# Altium PCB SolderingStation.PcbDoc
Units mil, origin at the board's own origin, x right, y up, seen from the top; angles counter-clockwise.
Board outline 5325 x 3910 mil, 2 copper layers (Top Layer, Bottom Layer); 64 components, 58 nets, 210 pads, 5 vias.
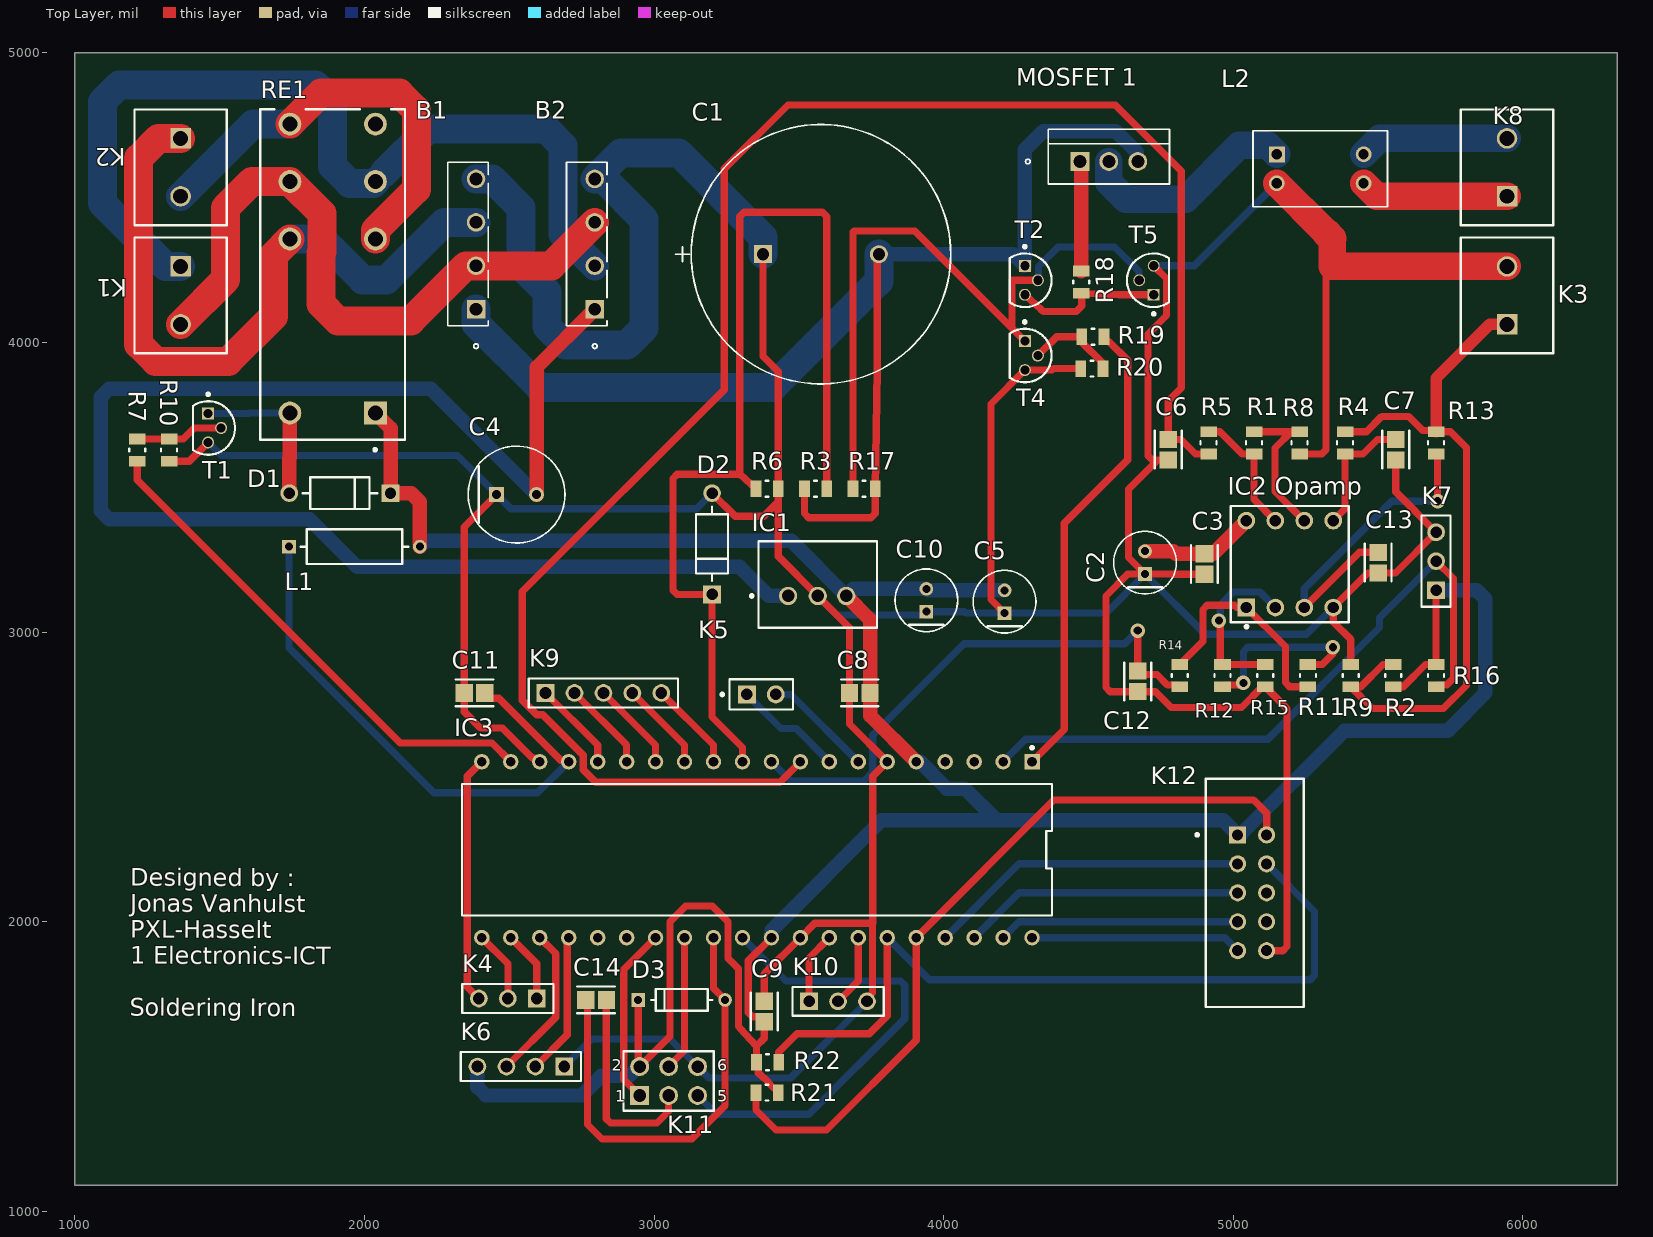
[diagram p0: Top Layer view]
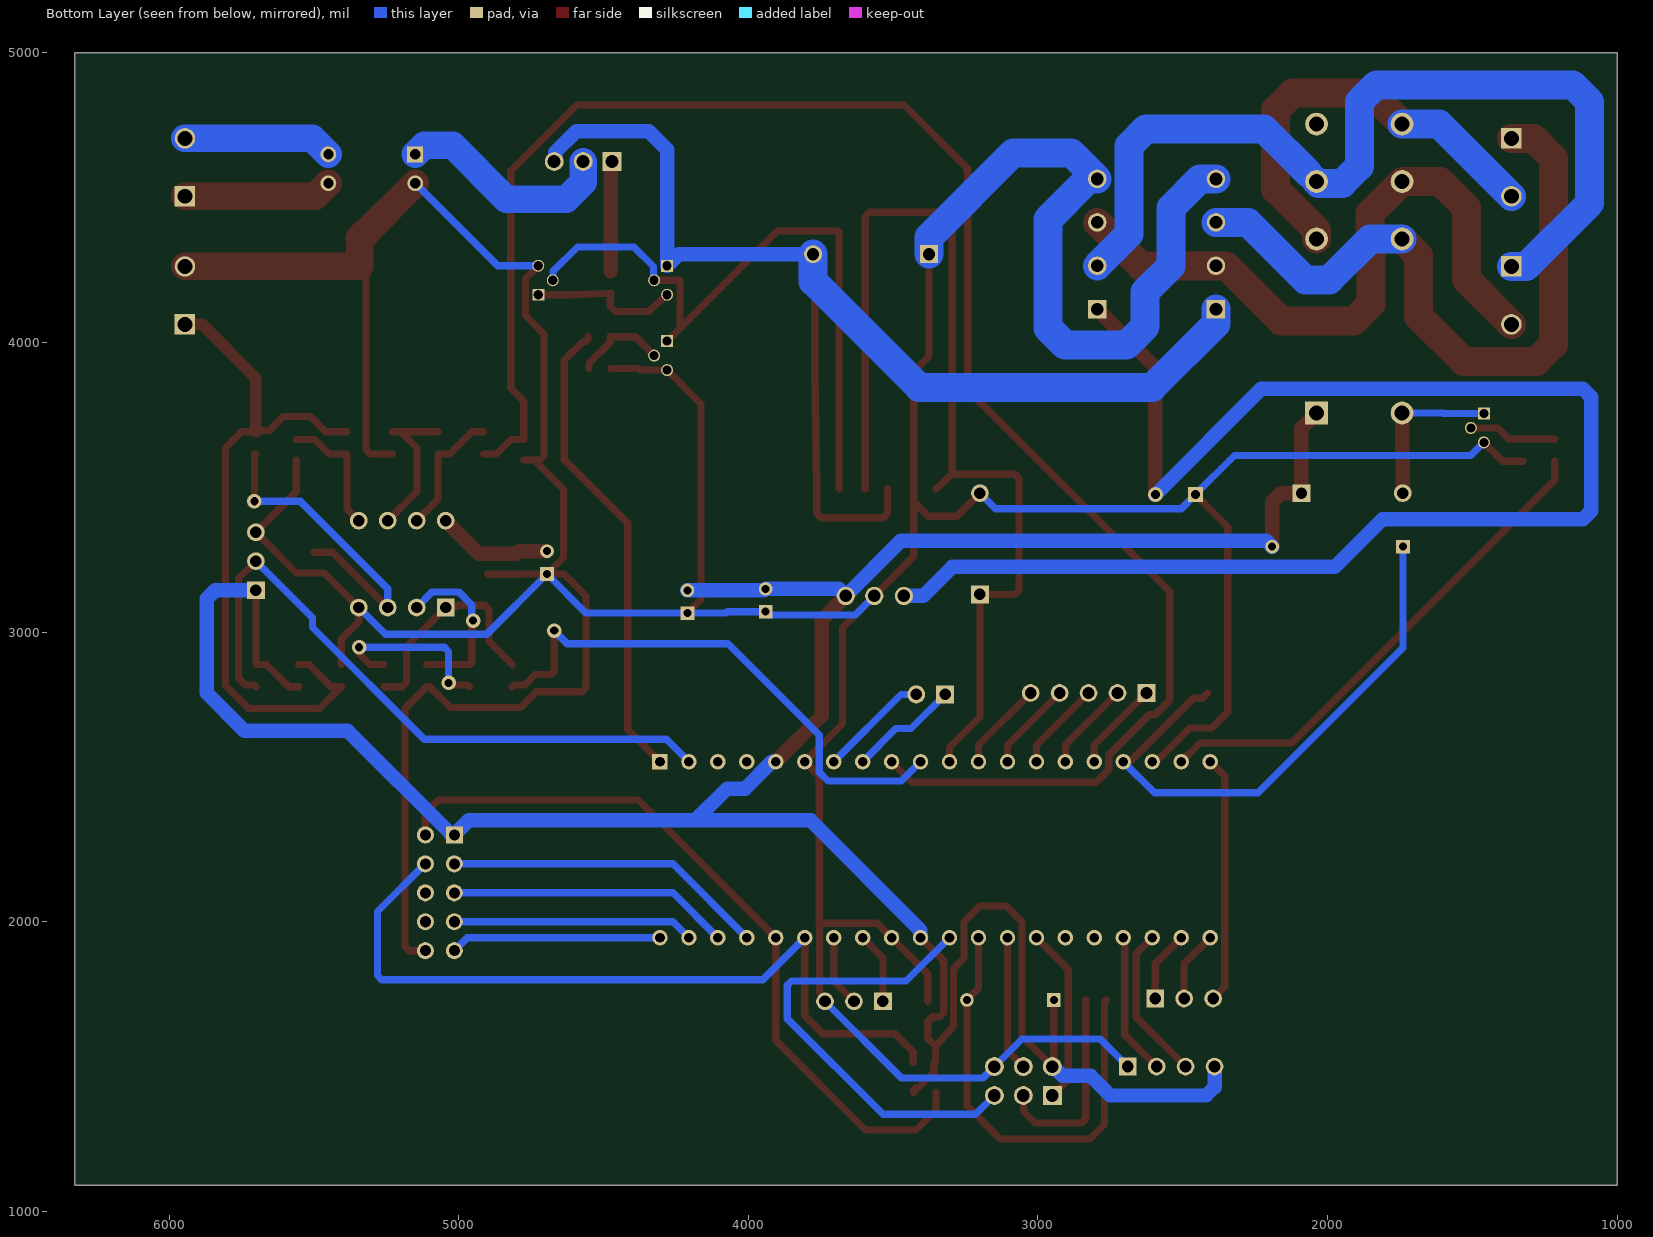
[diagram p1: Bottom Layer view, seen from below]
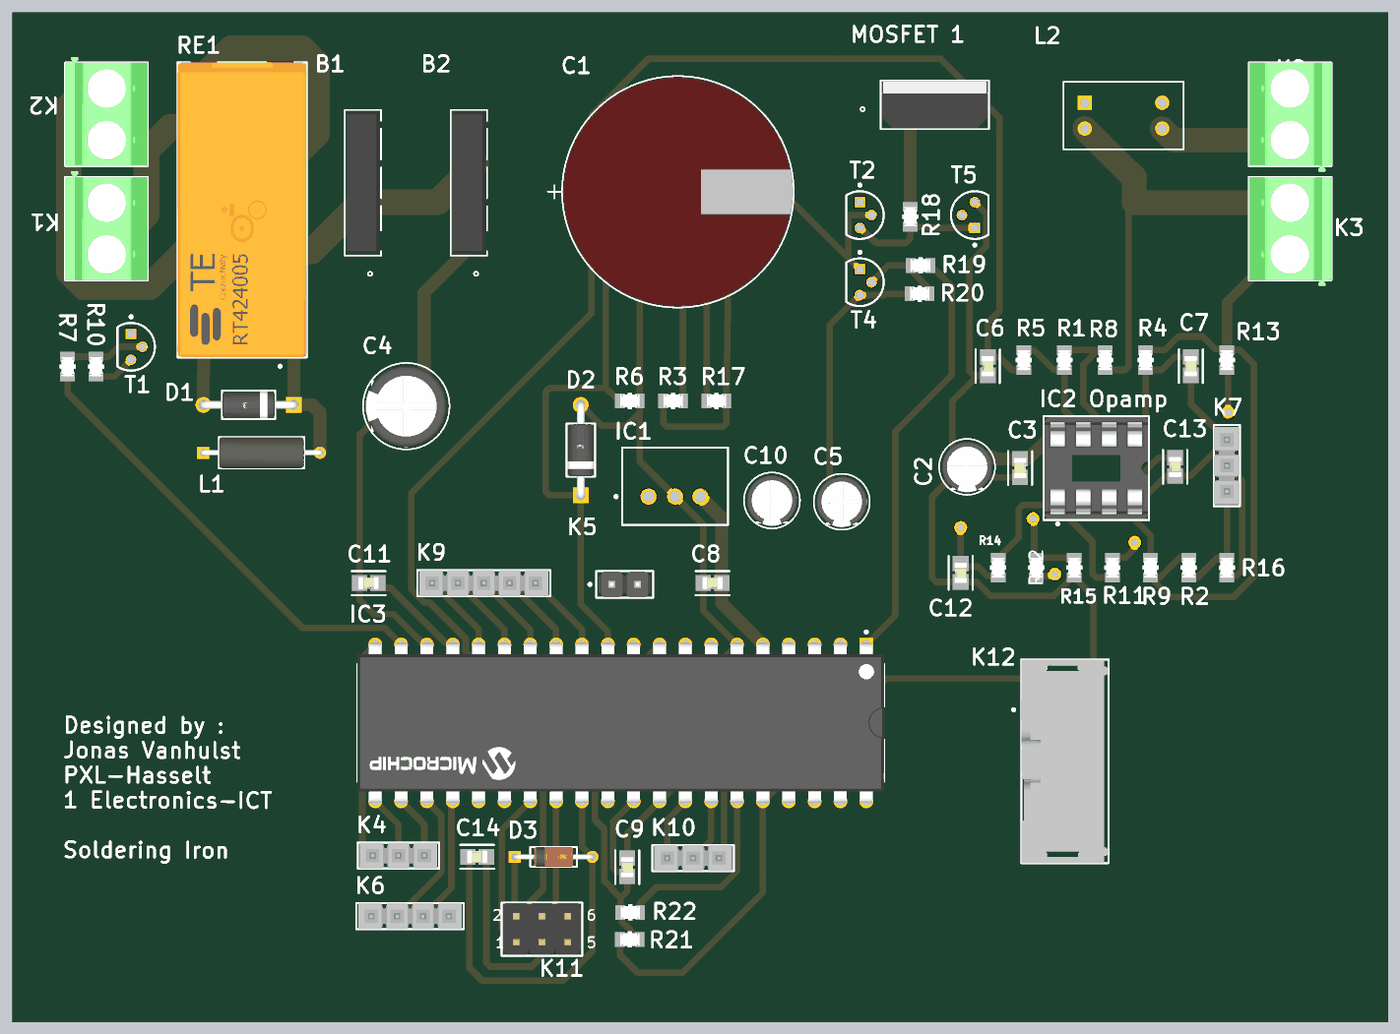
[diagram p2: 3D render of the assembled board from above, using the file's embedded part models]

## Layer stack, top to bottom
Top Solder: solder mask 0.4, Solder Resist, Dk 3.5
Top Layer: signal copper 1.4
Dielectric 1: dielectric 12.6, FR-4, Dk 4.8
Bottom Layer: signal copper 1.4
Bottom Solder: solder mask 0.4, Solder Resist, Dk 3.5

## Board outline
1000,1090 6325,1090 6325,5000 1000,5000

## Design rules (kind name [scope] priority, off if disabled: settings)
Clearance [All] p1: gap=10 ignorepadtopadclearanceinfootprint=FALSE except(0: Arc-Hole Track-Hole SMDPad-Hole THPad-Hole Via-Hole Fill-Hole Poly-Hole Region-Hole Text-Hole)
Height [All] p1: minheight=0 maxheight=2000 prefheight=500
HoleSize [All] p1: absolutevalues=TRUE maxlimit=1500 minlimit=1 maxpercent=80.000 minpercent=20.000
PolygonConnect [All] p1: connectstyle=Relief reliefconductorwidth=10 reliefentries=4 polygonreliefangle="90 Angle" airgapwidth=10
RoutingVias [All] p1: holewidth=28 width=50 viastyle="Through Hole" minholewidth=28 minwidth=50 maxholewidth=28 maxwidth=50
SolderMaskExpansion [All] p1: expansion=4 istentingtop=FALSE
Width [All] p1: maxlimit=100 minlimit=25 preferedwidth=25 minimp=50.000000 maximp=50.000000 favimp=50.000000
28 further rules are at their usual default settings.

## Classes and differential pairs
component class Voeding: B1 B2 C1 C4 C5 D1 D2 IC1 K1 K2 R3 R6 RE1
component class Thermokoppel: K8 L2 "MOSFET 1" R17 R18 R20 T2 T4 T5
component class PWM_Soldeerbout: C2 C3 C6 C7 C12 C13 "IC2 Opamp" K3 R1 R2 R4 R5 R8 R9 R11 R12 R13 R14 R15
component class Microprocessor: C8 C9 C10 C11 C14 D3 IC3 K4 K5 K6 K7 K9 K10 K11 K12 L1 R7 R10 R16 R19 R21 R22 T1

## Components (designator, comment, footprint, x,y, rotation, side; value= is the part's Value field where it differs from the comment)
B1 "D6KB6U" SIP4_D6K_MTC 2385,4115 r90 top
B2 "D6KB6U" SIP4_D6K_MTC 2795,4115 r90 top
C1 "4700µF 50V" CAP_Condensator_22X41 3376,4305 r0 top
C2 "10µF 50V" "cap 10µF 50V" 4695,3240 r90 top
C3 "100nF" FP-C0805C-DN-IPC_A 4900,3235.46 r270 top
C4 "100µF" "Cap 50V 100µF 8X11" 2525,3475 r0 top
C5 "10µF" "cap 10µF 50V" 4210,3105 r90 top
C6 "10nF" FP-C0805C-DN-IPC_A 4775,3630 r90 top
C7 "10nF" FP-C0805C-DN-IPC_A 5560.7,3630 r90 top
C8 "100nF" FP-C0805C-DN-IPC_A 3710,2790 r180 top
C9 "100nF" FP-C0805C-DN-IPC_A 3380,1690 r90 top
C10 "10µF 50V" "cap 10µF 50V" 3940,3110 r90 top
C11 "100nF" FP-C0805C-DN-IPC_A 2379.54,2790 r180 top
C12 "10nF" FP-C0805C-DN-IPC_A 4670,2830 r90 top
C13 "10nF" FP-C0805C-DN-IPC_A 5500,3240 r90 top
C14 "100nF" FP-C0805C-DN-IPC_A 2799.54,1730 r0 top
D1 "1N4007" 1N4007 1915,3480 r180 top value=15pF
D2 "5V1" 1N4007 3200,3305 r90 top
D3 "1N4148" 1N4148 3095,1730 r0 top
IC1 "OKI-78SR-5/1.5-W36-C" IC1 3565,3125 r0 top
"IC2 Opamp" "MCP6002-E/P" "8pin Socket" 5195,3235 r0 top
IC3 "ATMEGA4809-PF" ATMEGCPU 3355,2248.75 r270 top
K1 "1729128" "2pin connector" 1365,4162.71 r270 top
K2 "1729128" "2pin connector" 1365,4605 r270 top
K3 "" "2pin connector" 5945,4162.71 r90 top
K4 "" "Pinheader (1rij-3pin)" 2595,1735 r180 top
K5 "" "Pinheader (1rij-2pin)" 3370,2785 r0 top
K6 "" "Pinheader (1rij-4pin)" 2690,1500 r180 top
K7 "" "Pinheader (1rij-3pin)" 5700,3145 r90 top
K8 "" "2pin connector" 5945,4605 r90 top
K9 "" "Pinheader (1rij-5pin)" 2625,2790 r0 top
K10 "" "Pinheader (1rij-3pin)" 3535,1725 r0 top
K11 "" "Pinheader (2rij-6pin)" 3050,1450 r0 top
K12 "N2510-6002RB" boxheader 5065,2100 r270 top
L1 "10µH" "Spoel L1 10µH,130mA" 1965,3295 r0 top value=10uH
L2 "" spoel2 5150,4650 r0 top
"MOSFET 1" "IRF9Z34NPBF" IRF 4470,4625 r0 top
R1 "18K" "Weerstand 1M ohm" 5071.44,3653.74 r90 top
R2 "1M" "Weerstand 1M ohm" 5552.5,2850 r90 top
R3 "68K" "Weerstand 1M ohm" 3557.5,3495 r0 top
R4 "5K6" "Weerstand 1M ohm" 5385.72,3653.74 r90 top value="5600.00 Ohm"
R5 "5K6" "Weerstand 1M ohm" 4914.3,3653.74 r90 top value="5600.00 Ohm"
R6 "10K" "Weerstand 1M ohm" 3390,3495 r0 top
R7 "10K" "Weerstand 1M ohm" 1215,3628.39 r270 top
R8 "100R" "Weerstand 1M ohm" 5228.58,3653.74 r90 top
R9 "10M" "Weerstand 1M ohm" 5405,2850 r90 top
R10 "4K7" "Weerstand 1M ohm" 1325,3628.39 r90 top
R11 "18K" "Weerstand 1M ohm" 5257.5,2850 r90 top
R12 "18K" "Weerstand 1M ohm" 4962.5,2850 r90 top
R13 "5K6" "Weerstand 1M ohm" 5700,3653.74 r90 top value="5600.00 Ohm"
R14 "5K6" "Weerstand 1M ohm" 4815,2850 r90 top value="5600.00 Ohm"
R15 "100R" "Weerstand 1M ohm" 5110,2850 r90 top
R16 "4K7" "Weerstand 1M ohm" 5700,2850 r90 top
R17 "4K7" "Weerstand 1M ohm" 3725,3495 r0 top
R18 "100R" "Weerstand 1M ohm" 4475,4208.39 r90 top
R19 "10K" "Weerstand 1M ohm" 4515,4020 r0 top
R20 "4K7" "Weerstand 1M ohm" 4511.61,3910 r0 top
R21 "4K7" "Weerstand 1M ohm" 3390,1410 r0 top
R22 "4K7" "Weerstand 1M ohm" 3391.61,1515 r180 top
RE1 "RT424005" Vermogenrelais 1890,4235 r90 top
T1 "BC547B" sot23 1460,3705 r270 top
T2 "BC547B" sot23 4280,4215 r270 top
T4 "BC547B" sot23 4280,3955 r270 top
T5 "BC557C" BC557C 4725,4215 r90 top

## Footprints (in the part's own frame and the unit in brackets; to place one, negate y for a bottom-side part, rotate by r counter-clockwise, add the part's x,y. Pads: shape width x height; smd on the part's side, far side on the other; paste and mask are expansions set on the pad)
1N4007 [mm]
  rect 1.55x1.55 hole 1 paste-1000 mask+0: 1(-4.44,0)
  round 1.55 hole 1 paste-1000 mask+0: 2(4.44,0)
  silkscreen extent -3.27,-1.4 3.27,1.4, body extent -5.32,-1.5 5.32,1.5, height 0.25
1N4148 [mm]
  rect 1.2x1.2 hole 0.7 paste-1000 mask+0: 1(-3.813,0)
  round 1.2 hole 0.7 paste-1000 mask+0: 2(3.813,0)
  silkscreen extent -2.68,-0.95 2.68,0.95, body extent -4.51,-1.05 4.51,1.05, height 0.25
"2pin connector" [mm] "Receptacle, 2-Leads, Body 8.1x10.16mm, Pitch 5.08mm"
  rect 1.8x1.8 hole 1.3: 1(-2.54,0)
  round 1.8 hole 1.3: 2(2.54,0)
  silkscreen extent -5.08,-4.05 5.08,4.05, body extent -5.65,-4.05 5.08,4.05, height 10.01
"8pin Socket" [mm]
  rect 1.55x1.55 hole 1 paste-1000 mask+0: 1(-3.81,-3.81)
  round 1.55 hole 1 paste-1000 mask+0: 2(-1.27,-3.81) 3(1.27,-3.81) 4(3.81,-3.81) 5(3.81,3.81) 6(1.27,3.81) 7(-1.27,3.81) 8(-3.81,3.81)
  silkscreen extent -5.18,-5.61 5.18,5.1, body extent -5.28,-5.2 5.28,5.2, height 0.25
ATMEGCPU [mm]
  rect 1.35x1.35 hole 0.85 paste-1000 mask+0: 1(-7.715,24.13)
  round 1.35 hole 0.85 paste-1000 mask+0: 2(-7.715,21.59) 3(-7.715,19.05) 4(-7.715,16.51) 5(-7.715,13.97) 6(-7.715,11.43) 7(-7.715,8.89) 8(-7.715,6.35) 9(-7.715,3.81) 10(-7.715,1.27) 11(-7.715,-1.27) 12(-7.715,-3.81) 13(-7.715,-6.35) 14(-7.715,-8.89) 15(-7.715,-11.43) 16(-7.715,-13.97) 17(-7.715,-16.51) 18(-7.715,-19.05) 19(-7.715,-21.59) 20(-7.715,-24.13) 21(7.715,-24.13) 22(7.715,-21.59) 23(7.715,-19.05) 24(7.715,-16.51) 25(7.715,-13.97) 26(7.715,-11.43) 27(7.715,-8.89) 28(7.715,-6.35) 29(7.715,-3.81) 30(7.715,-1.27) 31(7.715,1.27) 32(7.715,3.81) 33(7.715,6.35) 34(7.715,8.89) 35(7.715,11.43) 36(7.715,13.97) 37(7.715,16.51) 38(7.715,19.05) 39(7.715,21.59) 40(7.715,24.13)
  silkscreen extent -9.07,-25.88 5.76,25.88, body extent -8.49,-26.71 8.49,26.71, height 0.25
BC557C [mm] "TO, 3-Leads, Body Dia 4.7mm, Pitch 1.27mm"
  rect 1.05x1.05 hole 0.8: 1(-1.27,0)
  round 1.05 hole 0.8: 2(0,1.27) 3(1.27,0)
  silkscreen extent -3.07,-1.34 2.35,2.35, body extent -2.38,-1.32 2.33,2.37, height 7.87
boxheader [mm] "Header, 10-Leads, Body 20.02x8.59mm, Pitch 2.54mm"
  rect 1.5x1.5 hole 0.97: 1(-5.08,-1.27)
  round 1.5 hole 0.97: 2(-5.08,1.27) 3(-2.54,-1.27) 4(-2.54,1.27) 5(0,-1.27) 6(0,1.27) 7(2.54,-1.27) 8(2.54,1.27) 9(5.08,-1.27) 10(5.08,1.27)
  silkscreen extent -10.01,-4.95 10.01,4.52, body extent -10.01,-4.11 10.01,4.52, height 9.92
"cap 10µF 50V" [mm]
  rect 1.2x1.2 hole 0.7 paste-1000 mask+0: 1(-1,0)
  round 1.2 hole 0.7 paste-1000 mask+0: 2(1,0)
  silkscreen extent -2.75,-2.75 2.75,2.75, body extent -2.85,-2.85 2.85,2.85, height 0.25
"Cap 50V 100µF 8X11" [mm]
  rect 1.3x1.3 hole 0.8 paste-1000 mask+0: 1(-1.75,0)
  round 1.3 hole 0.8 paste-1000 mask+0: 2(1.75,0)
  silkscreen extent -4.25,-4.25 4.25,4.25, body extent -4.35,-4.35 4.35,4.35, height 0.25
CAP_Condensator_22X41 [mil]
  rect 62x62 / inner round 60 / far side rect 62x62 hole 42 paste-31 mask+0: 1(0,0)
  round 62 / inner round 60 / far side round 62 hole 42 paste-31 mask+0: 2(400,0)
  silkscreen extent -303,-448 648,448, body extent -243,-443 644,443, height 1694
FP-C0805C-DN-IPC_A [mil]
  rect 59.24x61.27 smd paste+0 mask+0: 1(-35.46,0) 2(35.46,0)
  silkscreen extent -65,-46 65,46, body extent -85,-50 85,50, height 10
IC1 [mm] "THMT, 3-Leads, Body 10.4x7.6mm"
  round 1.6 hole 1.1: 1(-2.6,0) 2(0,0) 3(2.5,0)
  silkscreen extent -5.92,-2.8 5.2,4.8, body extent -5.2,-2.8 5.2,4.8, height 16.5
IRF [mil]
  rect 65x65 hole 45 mask+0: 1(0,0)
  round 65 hole 45 mask+0: 2(100,0) 3(200,0)
  silkscreen extent -187,-78 310,111, body extent -104,-73 304,106, height 748
"Pinheader (1rij-2pin)" [mm]
  rect 1.57x1.57 hole 1.02 paste-1000 mask+0: 1(-1.27,0)
  round 1.57 hole 1.02 paste-1000 mask+0: 2(1.27,0)
  silkscreen extent -3.55,-1.32 2.79,1.32, body extent -2.89,-1.42 2.89,1.42, height 0.25
"Pinheader (1rij-3pin)" [mm] ".025 SQ Post Terminal Strip Assembly, 1x3 Pins, Vertical, 2.54mm Pitch, Male"
  rect 1.55x1.55 hole 1.02: 1(0,0)
  round 1.55 hole 1.02: 2(2.54,0) 3(5.08,0)
  silkscreen extent -1.46,-1.27 6.54,1.27, body extent -1.27,-1.27 6.35,1.27, height 8.38
"Pinheader (1rij-4pin)" [mm] ".025 SQ Post Terminal Strip Assembly, 1x4 Pins, Vertical, 2.54mm Pitch, Male"
  rect 1.55x1.55 hole 1.02: 1(0,0)
  round 1.55 hole 1.02: 2(2.54,0) 3(5.08,0) 4(7.62,0)
  silkscreen extent -1.46,-1.27 9.08,1.27, body extent -1.27,-1.27 8.89,1.27, height 8.38
"Pinheader (1rij-5pin)" [mm] ".025 SQ Post Terminal Strip Assembly, 1x5 Pins, Vertical, 2.54mm Pitch, Male"
  rect 1.55x1.55 hole 1.02: 1(0,0)
  round 1.55 hole 1.02: 2(2.54,0) 3(5.08,0) 4(7.62,0) 5(10.16,0)
  silkscreen extent -1.46,-1.27 11.62,1.27, body extent -1.27,-1.27 11.43,1.27, height 5.21
"Pinheader (2rij-6pin)" [mm] "Pin Header, pitch 2.54 mm, THT, Vertical, dual row, 6p"
  rect 1.65x1.65 hole 1.1: 1(-2.54,-1.27)
  round 1.65 hole 1.1: 2(-2.54,1.27) 3(0,-1.27) 4(0,1.27) 5(2.54,-1.27) 6(2.54,1.27)
  silkscreen extent -3.96,-2.61 3.96,2.61, body extent -3.81,-2.54 3.81,2.54, height 8.59
SIP4_D6K_MTC [mil]
  rect 64x64 hole 44 mask+0: 1(0,0)
  round 64 hole 44 mask+0: 2(150,0) 3(300,0) 4(450,0)
  silkscreen extent -135,-42 508,98, body extent -53,-37 502,93, height 484
sot23 [mm] "TO, 3-Leads, Body Dia 4.7mm, Pitch 1.27mm"
  rect 1.05x1.05 hole 0.8: 1(-1.27,0)
  round 1.05 hole 0.8: 2(0,1.143) 3(1.27,0)
  silkscreen extent -3.07,-1.34 2.35,2.35, body extent -2.35,-1.33 2.36,2.36, height 7.87
spoel2 [mil]
  rect 55x55 hole 35 mask+0: 1(0,0)
  round 55 hole 35 mask+0: 2(0,-100) 3(300,-100) 4(300,0)
  silkscreen extent -82,-181 382,81, body extent 0,0 10,10, height 10
"Spoel L1 10µH,130mA" [mm]
  rect 1.2x1.2 hole 0.7 paste-1000 mask+0: 1(-5.736,0)
  round 1.2 hole 0.7 paste-1000 mask+0: 2(5.736,0)
  silkscreen extent -4.74,-1.53 4.74,1.53, body extent -6.44,-1.63 6.44,1.63, height 0.25
Vermogenrelais [mm]
  round 2 hole 1.3 paste-1000 mask+0: 11(8.15,-3.75) 12(3.11,-3.75) 14(13.19,-3.75) 21(8.15,3.75) 22(3.11,3.75) 24(13.19,3.75) A2(-12.15,3.75)
  rect 2x2 hole 1.3 paste-1000 mask+0: A1(-12.15,-3.75)
  silkscreen extent -15.5,-6.35 14.5,6.35, body extent -14.6,-6.45 14.6,6.45, height 0.25
"Weerstand 1M ohm" [mm]
  rect 0.95x1.45 smd paste+0 mask+0: 1(-0.975,0) 2(0.975,0)
  silkscreen extent -0.13,-0.7 0.13,0.7, body extent -1.55,-0.82 1.55,0.82, height 0.25

## Part data
B1 B2: "No Description Available", Mfr_Name=Multicomp, Copyright="Copyright (C) 2023 Ultra Librarian. All rights reserved.", Manufacturer_Part_Number=D6KB6U, RefDes=RefDes, Type=DEV
C1: library part "4700µF 50V 22X40", "22x40", Manufacturer_Part_Number=EETHC1H472HJ, Mfr_Name=Panasonic, Copyright="Copyright (C) 2023 Ultra Librarian. All rights reserved.", RefDes=RefDes, Type=DEV
C2 C10: "Aluminum Electrolytic Capacitors (Radial Lead Type) 10uF ±20% 50V", Capacitance=10uF, Case/Package=Radial, Max Operating Temperature=105°C, Min Operating Temperature=-40°C, Ripple Current (AC)=250mA, Tolerance=20%, Voltage=50V, Construction=RADIAL, Diameter=5mm, Height=11mm, Impedance=340mR, Lead Diameter=0.5mm, Lead Pitch=2mm, Life (Hours)=5000Hour, REACH SVHC=Yes, RoHS Compliant=Yes, Series="FR Radial", Termination=Radial, Voltage Rating=50V
C3 C8 C9 C11 C14: library part "cap 50V 100nF", "Chip Multilayer Ceramic Capacitors for Automotive, 0805, 0.10uF, X7R, 15%, 10%, 50V, Grade 1", Case Code (Imperial)=0805, Case Code (Metric)=2012, Dielectric=X7R, Max Operating Temperature=125°C, Min Operating Temperature=-55°C, Package Quantity=3000, Ratings=AEC-Q200, Tolerance=10%, Voltage Rating=50V, Capacitance=100nF, Case/Package=0805, Depth=1.25mm, Height=1.25mm, Length=2mm, Mount="Surface Mount", Packaging="Tape and Reel", Termination=SMD/SMT, Thickness=0.049inch, Voltage Rating (DC)=50V, Weight=0.000335oz, Width=0.049inch
C4: library part "Cap 50V 100µF 8x11", "Aluminum Electrolytic Capacitors (Radial Lead Type) AEC-Q200 Qualified 100uF ±20% 50V", Capacitance=100uF, Case/Package=Radial, Max Operating Temperature=105°C, Min Operating Temperature=-55°C, Package Quantity=200, Ripple Current=180mA, Tolerance=20%, Voltage=50V, Construction=RADIAL, Diameter=8mm, Height=11.5mm, Height - Seated (Max)=0.512inch, Lead Diameter=0.6mm, Lead Pitch=3.5mm, Lead/Base Style=Straight, Length=11.5mm, Life (Hours)=1000Hour, Mount="Through Hole", Number of Pins=2, Packaging=Bulk, Polarity=Polar, REACH SVHC="No SVHC", Ripple Current (AC)=180mA, RoHS Compliant=Yes, Series=HD, Termination=Radial, Voltage Rating=50V, Voltage Rating (DC)=50V
C5: library part "10µF 50V", "Aluminum Electrolytic Capacitors (Radial Lead Type) 10uF ±20% 50V", Capacitance=10uF, Case/Package=Radial, Max Operating Temperature=105°C, Min Operating Temperature=-40°C, Ripple Current (AC)=250mA, Tolerance=20%, Voltage=50V, Construction=RADIAL, Diameter=5mm, Height=11mm, Impedance=340mR, Lead Diameter=0.5mm, Lead Pitch=2mm, Life (Hours)=5000Hour, REACH SVHC=Yes, RoHS Compliant=Yes, Series="FR Radial", Termination=Radial, Voltage Rating=50V
C6 C7 C12 C13: library part "cap 10nF X7R 50V", Manufacturer=Vitramon, Part Number=VJ0805Y103KXACW1BC
D1: "Rectifier diode 1000 V 1 A DO-41, ,", Capacitance=15pF, Forward Current=1A, Manufacturer=Diotec, Max Junction Temp=+175°C, Max Repetitive Reverse Voltage=1000V, Max Surge Forward Current=27A, Peak Reverse Current=5uA, Temperature="-50°C to +175°C", Temperature Range Low=-50°C, Automotive=No, Category=Diode, ComponentLink2Description=Datasheet, ComponentLink2URL=https://datasheet.octopart.com/1N4007-Diotec-datasheet-62346875.pdf, Device Class L1="Discrete Semiconductors", Device Class L2=Diodes, Device Class L3="Rectifier Diodes", Height=2.8mm, Ipc Land Pattern Name=DIOAD888W100L520D280, Lead Free=Yes, Manufacturer Part Number=1N4007, Octopart=https://octopart.com/1n4007-diotec-4040411, Package=1N4007, Reverse Voltage=1000V, RoHS=TRUE, Temperature Range High=+175°C
D2: library part Zenerdiode, "Zener Voltage Regulator, 500 mW, 2-Pin SOD-123, Pb-Free, Tape and Reel", Manufacturer="On Semiconductor", PartNumber=MMSZ4689T1G, ComponentLink1Description="Manufacturer URL", ComponentLink1URL=http://www.onsemi.com/, ComponentLink2Description=Datasheet, ComponentLink2URL=http://www.onsemi.com/pub_link/Collateral/MMSZ4678T1-D.PDF, ComponentLink3Description="Package Specification", ComponentLink3URL=http://www.onsemi.com/pub_link/Collateral/425-04.PDF, DatasheetVersion="Rev. 9", Mounting Technology="Surface Mount", P Max (W)=0.5, PackageDescription="2-Pin SOD, Body 1.6 x 2.69 mm", PackageReference=SOD-123-2-425-04, PackageVersion="Rev. G, 10/2009", Packing="Tape and Reel", RoHS=Pb-Free, VZ Typ (V)=5.1
D3: "DIODE GEN PURP 100V 200MA DO35", Average Rectified Current=200mA, Capacitance=4pF, Case/Package=DO-35, Current=4A, Forward Current=300mA, Forward Voltage=1V, Max Forward Surge Current (Ifsm)=1A, Max Operating Temperature=175°C, Max Power Dissipation=500mW, Max Repetitive Reverse Voltage (Vrrm)=100V, Max Reverse Current=5uA, Min Operating Temperature=-65°C, Package Quantity=2000, Contact Plating=Tin, Current Rating=200mA, Diameter=1.91mm, Element Configuration=Single, Height=4.56mm, Lead Free="Lead Free", Length=4.56mm, Max Reverse Voltage (DC)=100V, Max Surge Current=4A, Mount="Through Hole", Number of Pins=2, Output Current=200mA, Outside Diameter=1.85mm, Packaging=Bulk, Peak Non-Repetitive Surge Current=4A, Polarity=Standard, Power Dissipation=500mW, Radiation Hardening=No, REACH SVHC="No SVHC", Recovery Time=4ns, Reverse Recovery Time=4ns, Reverse Voltage=100V, Series=-, Voltage=100V, Voltage Rating (DC)=100V, Weight=0.01lb, Width=1.91mm
IC1: library part IC1, "Non-Isolated DC/DC Converter, 7.5 W, 7 to 36 V, 1.5 A, -40 to 85 degC, 3-Pin THD, RoHS", Current - Output (Max)=1.5A, Manufacturer=Murata, Operating Temperature=-40degC~85degC, Package / Case=3-SIPModule, Power (Watts) - Manufacture Series=8W, Voltage - Input (Max)=36V, Voltage - Input (Min)=7V, Voltage - Isolation=-, Voltage - Output 1=5V, Applications=ITE(Commercial), Category=PowerSupplies-BoardMount, Datasheet URL=https://datasheet.ciiva.com/8006/1790439-8006672.pdf, Datasheet Version=Oct-13, Efficiency=90.5%, Family=DCDCConverters, Features=SCP, Manufacturer URL=http://www.murata.com/, Mounting Type=ThroughHole, Number of Outputs=1, Packaging=Tube, Power (Watts) - Max=8W, Series=Okami™OKI-78SR, Size / Dimension="0.41\"Lx0.30\"Wx0.65\"H(10.4mmx7.6mmx16.5mm)", Type=LinearRegulatorReplacement, Voltage - Output 2=-, Voltage - Output 3=-
"IC2 Opamp": "No Description Available", Mfr_Name=Microchip, Copyright="Copyright (C) 2023 Ultra Librarian. All rights reserved.", Manufacturer_Part_Number=MCP6002-E/P, RefDes=RefDes, Type=DEV
IC3: "IC MCU 8BIT 48KB FLASH 40DIP", RoHS Compliant=Yes
K1 K2: library part "2pin connector", "PCB Terminal Block, 13.5 A, 400 V, 2-Pin THD, RoHS, Bulk", Current Rating=13500mA, Manufacturer="Phoenix Contact", Package Description="2-Pin Through Hole Device, Body 8.1 x 10.16 mm, Pitch 5.08 mm", Package Reference=1729128-2, Package Version=03/2015, Voltage Rating=400V, Datasheet URL=https://datasheet.ciiva.com/16046/1729128-16046181.pdf, Datasheet Version=12/2013, Manufacturer URL=http://www.phoenixcontact.com/, Mounting Technology=ThroughHole, No. of Positions=2, No. of Rows=1, Orientation=Horizontal, Package URL=https://www.phoenixcontact.com/online/portal/pi/pxc/product_detail_page/!ut/p/b1/3VdJjqNKFDxLH8AFycySyWY2ozFsEPOMMQaDOX1XedGL_1Vdm5YXJleknhSKeBkvI6EA8ncAo3AYoDhBQGco6KN7VURTdemj9us_IEKEZo_YHiPAEWEFmDGOHMORkqKYCORBZxgL7ZoaZYcbFFUZ3fqxSY6GOuxydWUuHqz1ynmMFygu583Bob0Ewr6Sd_l-5m-kAueHiB0jpRwZwe58wwtkpxtMYd_LmGcDRU02dRNEyWt6Y2ti5pSyJ_reIkzIulrqApdnbT11V5jnCKbYNCvhEM1MCpPByat_X379-iThf08CI5GfOPqfBeS3BRoBOdD55AKVv0iLwCMq-2BrzXWSGRH7pUGD9uwXQjiph3xL0DKQwdGa0JImiIOmBNOestqgwTHSSs2oOep-78apyXQBvNi8ZLaFjvjWvcaUEBu0MC6Wbe-d6mB0FAebo2lUWinqYaZs5DAYzV0RP9yitUjnGJ0iI9xhZkT42OCQNUJJhkgWINNQLP2JFP6OpMg3JCVg70jqHT0lvKOnhHf0lPuOnnLf0VPuWx6_dxwUIvwk5WMkT0kLL1mh61l2yZVSzG3pYV_bqo-mj6uMKwKwdnnW8Jh5RTOJzMOA5c-eJDaZQw4mTMPH02PvS_ZAqNVjVTo2WyYLkwH_KU1mmmG5kjRhDqPXLwwVHvVOjCM60-fpXvTDfMGW1PVFVS1r4e4yVDk4ZdNbkUHvqPqQSeian4UD39fNKmachqdJ1NJbyk8rXT9mXTvPk3oE5meulKGgiruPJek-4I9hTT6G8ZLOyRSm2RRVbThERQad5OS28hdt4YW4vG0stgYYzsWsK4_7y6DZMjJSCqri1kyiZR5vD7pwIrNR7QwPHTcLTI5qT7eRlpHrdGiupYlqQDJ7zy_CND8fWWBoLRXxk1RVcXiBQwbTD4Xi7KL-FuO94t9xaqweXzH, Packing=Bulk, PartNumber=1729128, Pitch=5.08mm, RoHS=TRUE
K3 K8: library part "Printkroonsteen 2pin", "PC Terminal Block, Pitch 6.35 mm, 1 x 2 Position, Height 21.5 mm, Tail Lenght 5.1 mm, RoHS, Bulk", Manufacturer="Phoenix Contact", Package Description="PC Terminal Block, Pitch 6.35 mm, 1 x 2 Position, Height 21.5 mm, Tail Lenght 5.1 mm", Package Reference=1714955, Datasheet URL=http://media.digikey.com/pdf/Data%20Sheets/Phoenix%20Contact%20PDFs/1714955.pdf, Datasheet Version=02/2010, Manufacturer URL=http://www.phoenixcontact.com/, Mounting Technology=ThroughHole
K4 K7 K10: library part "Pinheader (1rij-3pin)", "0.025\" SQ Post Header, Through-hole, Vertical, -55 to 105 degC, 2.54 mm Pitch, 3-Pin, Male, RoHS", Manufacturer=Samtec, PartNumber=TSW-103-07-T-S, Temperature Range="-55 to 105 degC", ComponentLink1Description="Manufacturer URL", ComponentLink1URL=http://www.samtec.com, ComponentLink2Description=Datasheet, ComponentLink2URL=http://www.samtec.com/documents/webfiles/pdf/TSW_TH.PDF, ComponentLink3Description="Package Specification", ComponentLink3URL=http://www.samtec.com/documents/webfiles/cpdf/TSW-XXX-XX-XXX-X-XX-XXX-MKT.pdf, DatasheetVersion=F-214, Mounting Technology=Through-hole, Orientation=Vertical, PackageDescription=".025[0.64] SQ. Post Terminal Strip Assembly", PackageReference=TSW-103-07-X-S, PackageVersion="DM, 8/1988", Pitch="2.54 mm", RoHS=True
K5: library part "Pinheader (1rij-2pin)", "CONN HEADER VERT 2POS 2.54MM", Current Rating=3A, Manufacturer=Harwin, Manufacturer Part Number=M20-9990246, Temperature="-40°C to +105°C", Temperature Range High=+105°C, Temperature Range Low=-40°C, Automotive=No, Category=Conn, ComponentLink2Description=Datasheet, ComponentLink2URL=https://cdn.harwin.com/pdfs/M20-999.pdf, Conn Gender=Male, Conn Orientation=Vertical, Contact Material=Tin,Nickel, Device Class L1=Connectors, Device Class L2="Headers and Wire Housings", Device Class L3=unset, Digikey Description="CONN HEADER VERT 2POS 2.54MM", Height=8.99mm, Lead Free=Yes, Mouser Description="2.54mm (0.1\") Pitch SIL Vertical PC Tail Pin Header, 6.1mm mating pin height, tin, 2 contacts", Number of Contacts=2, Number of Rows=1, Octopart=https://octopart.com/m20-9990246-harwin-2590635, Package=M20-9990246, Pitch=2.54mm, RoHS=TRUE
K6: library part "Pinheader (1rij - 4pin)", "0.025\" SQ Post Header, Through-hole, Vertical, -55 to 125 degC, 2.54 mm Pitch, 4-Pin, Male, RoHS", Manufacturer=Samtec, PartNumber=TSW-104-08-L-S, Temperature Range="-55 to 125 degC", ComponentLink1Description="Manufacturer URL", ComponentLink1URL=http://www.samtec.com, ComponentLink2Description=Datasheet, ComponentLink2URL=http://www.samtec.com/documents/webfiles/pdf/TSW_TH.PDF, ComponentLink3Description="Package Specification", ComponentLink3URL=http://www.samtec.com/documents/webfiles/cpdf/TSW-XXX-XX-XXX-X-XX-XXX-MKT.pdf, DatasheetVersion=F-214, Mounting Technology=Through-hole, Orientation=Vertical, PackageDescription=".025[0.64] SQ. Post Terminal Strip Assembly", PackageReference=TSW-104-08-X-S, PackageVersion="DM, 8/1988", Pitch="2.54 mm", RoHS=True
K9: library part "Pinheader (1rij-5pin)", "0.025\" SQ Post Header, Through-hole, Vertical, -55 to 125 degC, 2.54 mm Pitch, 5-Pin, Male, RoHS", Manufacturer=Samtec, PartNumber=TSW-105-05-F-S, Temperature Range="-55 to 125 degC", ComponentLink1Description="Manufacturer URL", ComponentLink1URL=http://www.samtec.com, ComponentLink2Description=Datasheet, ComponentLink2URL=http://www.samtec.com/documents/webfiles/pdf/TSW_TH.PDF, ComponentLink3Description="Package Specification", ComponentLink3URL=http://www.samtec.com/documents/webfiles/cpdf/TSW-XXX-XX-XXX-X-XX-XXX-MKT.pdf, DatasheetVersion=F-214, Mounting Technology=Through-hole, Orientation=Vertical, PackageDescription=".025[0.64] SQ. Post Terminal Strip Assembly", PackageReference=TSW-105-05-X-S, PackageVersion="DM, 8/1988", Pitch="2.54 mm", RoHS=True
K11: library part "Pinheader (2rij-6pin)", "THT Vertical Pin Header WR-PHD, Pitch 2.54 mm, Dual Row, 6 pins", Contact Resistance=20mOhm, Manufacturer="Wurth Elektronik", Operating Temperature=-40to105degC, Package Reference=61300621121, Rated Current=3A, Withstanding Voltage=500VAC, Working Voltage=250VAC, Datasheet URL=https://katalog.we-online.de/em/datasheet/6130xx21121.pdf, Gender=Male, Manufacturer URL=http://www.we-online.de, Mounting Technology=THT, Orientation=Vertical, Packaging=Bag, Part Number=61300621121, Pin Number=6, Pitch=2.54mm, Publisher=WurthElektronik, Row Number=Dual
K12: library part boxheader, "Male Header, Pitch 2.54 mm, 2 x 5 Postion, Height 9.91 mm, Tail Length 2.84 mm, -55 to 105 degC, RoHS, Bulk", Manufacturer=3M, Package Description="10-Pin Through Hole Device, Body 20.02 x 8.59 mm, Pitch 2.54 mm", Package Reference=N2510-6002-10, Package Version="Rev. M, 08/2014", PartNumber=N2510, Contact Plating=GoldOverNickel, Datasheet URL=https://datasheet.ciiva.com/11746/0900766b807b18da-11746957.pdf, Datasheet Version=05/2007, Gender=Male, Manufacturer URL=http://www.3m.com/, Mounting Technology=ThroughHole, No. of Positions=10, No. of Rows=2, Number of Contacts=10, Number of Rows=2, Orientation=Straight, Package URL=http://multimedia.3m.com/mws/media/330367O/3mtm-100-in-4-wall-hdr-rohs-lp-straightra-hitemp-ts0770.pdf, Packaging=Rail/Tube, Pitch=2.54mm, Rad Hard=No, Termination Method=Solder, Type=ShroudedHeader
L1: library part "Spoel L1 10µH,130mA", "IR-2 10 10% B08", Inductance=10uH, Manufacturer="Vishay Dale", Manufacturer Part Number=IR02BH100K, Package=IR02, Saturation Current=130mA, Self Resonant Frequency=50MHz, Series Resistance=3.7Ω, Temperature="-55°C to +105°C", Temperature Range High=+105°C, Temperature Range Low=-55°C, Test Frequency=7.9MHz, Tolerance=10%, Automotive=No, Category=Ind, ComponentLink2Description=Datasheet, ComponentLink2URL=https://datasheet.ciiva.com/8536/ir-8536517.pdf, Core Material=Iron, Device Class L1="Passive Components", Device Class L2=Inductors, Device Class L3="Fixed Inductors", Digikey Description="IR-2 10 10% B08", Height=3.05mm, Ipc Land Pattern Name=CAPAD1147W70L838D305, Lead Free=Yes, Mouser Description="Fixed Inductors 10uH 10%", Obsolete Part=true, Octopart=https://octopart.com/ir02bh100k-vishay+dale-39675774, Q Factor=55, RoHS=TRUE
L2: library part Spoel2, "No Description Available", Manufacturer_Part_Number=CM2545X171B-10, Mfr_Name=Laird, Copyright="Copyright (C) 2023 Ultra Librarian. All rights reserved.", RefDes=RefDes, Type=DEV
"MOSFET 1": "No Description Available", Mfr_Name=Infineon, Copyright="Copyright (C) 2023 Ultra Librarian. All rights reserved.", Manufacturer_Part_Number=IRF9Z34NPBF, RefDes=RefDes, Type=DEV
R1 R11 R12: library part "Weerstand 18kohm", Manufacturer="Vishay Dale", Part Number=CRCW080518K0FKEA
R2: library part "Weerstand 1M ohm", "RES Thick Film, 1MΩ, 1%, 0.125W, 100ppm/°C, 0805", Case Code (Imperial)=0805, Case Code (Metric)=2012, Max Operating Temperature=155°C, Min Operating Temperature=-55°C, Package Quantity=5000, Power Rating=125mW, Resistance=1MR, Temperature Coefficient=100ppm/°C, Tolerance=1%, Voltage Rating=150V, Case/Package=0805, Composition="Thick Film", Contact Plating=Tin, Depth=1.25mm, Height=0.45mm, Lead Free="Lead Free", Length=2mm, Military Standard=Not, Mount="Surface Mount", Number of Pins=2, Packaging="Tape and Reel", Radiation Hardening=No, Termination=SMD/SMT, Voltage Rating (DC)=150V, Weight=0.000194oz, Width=1.25mm
R3: library part "Weerstand 68k ohm", Manufacturer="Vishay Dale", Part Number=CRCW080568K0FKEA
R4 R5 R13 R14: library part "Weerstand 5K6", "5K6 0.125W 5% 0805 (2012 Metric)  SMD", Case-EIA=0805, Case-Metric=2012, Power="0.125 W", Tolerance="5 %", Technology=SMT
R6 R7 R19: library part "Weerstand 10K ohm", "RES Thick Film, 10kΩ, 1%, 0.125W, 100ppm/°C, 0805", Case Code (Imperial)=0805, Case Code (Metric)=2012, Max Operating Temperature=155°C, Min Operating Temperature=-55°C, Package Quantity=5000, Power Rating=125mW, Resistance=10kR, Temperature Coefficient=100ppm/°C, Tolerance=1%, Voltage Rating=150V, Case/Package=0805, Composition="Thick Film", Contact Plating=Tin, Depth=1.25mm, Height=0.45mm, Lead Free="Lead Free", Length=2mm, Military Standard=Not, Packaging="Tape and Reel", Radiation Hardening=No, Termination=SMD/SMT, Voltage Rating (DC)=150V, Weight=0.000194oz, Width=1.25mm
R8 R15 R18: library part "Weerstand 100 ohm", Manufacturer="Vishay Dale", Part Number=CRCW0805100RFKEA
R9: library part "Weerstand 10M ohm", "RES Thick Film, 10MΩ, 1%, 0.125W, 100ppm/°C, 0805", Case Code (Imperial)=0805, Case Code (Metric)=2012, Max Operating Temperature=155°C, Max Power Dissipation=125mW, Min Operating Temperature=-55°C, Package Quantity=10, Resistance=10MR, Temperature Coefficient=100ppm/°C, Tolerance=5%, Voltage Rating=150V, Case/Package=0805, Composition="Thick Film", Contact Plating=Tin, Depth=1.25mm, Features="Automotive AEC-Q200", Height=0.02inch, Lead Free="Lead Free", Length=2mm, Military Standard=Not, Mount="Surface Mount", Number of Terminations=2, Packaging="Tape and Reel", Power Rating=125mW, Radiation Hardening=No, Termination=SMD/SMT, Voltage Rating (DC)=150V, Weight=0.000194oz, Width=0.049inch
R10 R16 R17 R20 R21 R22: library part "Weerstand 4K7 ohm", Manufacturer="Vishay Dale", Part Number=CRCW08054K70JNEB
RE1: library part Vermogenrelais, "RELAY GENERAL PURPOSE DPDT 8A 5V", Ambient Temperature Range High=+85°C, Ambient Temperature Range Low=-40°C, Coil Power=403mW, Coil Resistance=62Ω, Coil Voltage=5V, Current Rating=8A, Manufacturer="TE Connectivity", Automotive=No, Category=Relay, Coil Type=Non-Latching, ComponentLink2Description=Datasheet, ComponentLink2URL=https://www.te.com/commerce/DocumentDelivery/DDEController?Action=showdoc&DocId=Data+Sheet%7FRT2%7F1014%7Fpdf%7FEnglish%7FENG_DS_RT2_1014.pdf%7F5-1393243-9, Device Class L1=Electromechanical, Device Class L2=Relays, Device Class L3="Power Relays", Digikey Description="RELAY GENERAL PURPOSE DPDT 8A 5V", Height=15.7mm, Lead Free=Yes, Manufacturer Part Number=RT424005, Mouser Description="General Purpose Relay, Rt2 Series, Power, Non Latching, Dpdt, 5 Vdc, 8 A Rohs Compliant: Yes", Number of Contacts=2, Octopart=https://octopart.com/5-1393243-9-te+connectivity-41835766, Package=RT424005, RoHS=TRUE, Throw Configuration=DPDT
T1 T2 T4: library part "sot23 (bc547)", "Amplifier Transistor, NPN Silicon, 3-Pin TO-92, Bulk Box", Manufacturer="On Semiconductor", ComponentLink1Description="Manufacturer URL", ComponentLink1URL=http://www.onsemi.com/, ComponentLink2Description=Datasheet, ComponentLink2URL=http://www.onsemi.com/pub_link/Collateral/BC546-D.PDF, ComponentLink3Description="Package Specification", ComponentLink3URL=http://www.onsemi.cn/pub_link/Collateral/2N6426-D.PDF, DatasheetVersion="Rev. 7", fT Min (MHz)=150, IC Continuous (A)=0.1, Mounting Technology="Through Hole", PackageDescription="3-Pin Transistor Outline, Body 4.825 x 3.685 mm, Pitch 1.27 mm", PackageReference=TO-92-3-29-11_AM_SL, PackageVersion="Rev. AM", Packing="Bulk Box", PartNumber=BC547B, Polarity=NPN, RoHS=FALSE
T5: "Amplifier Transistor, PNP Silicon, 3-Pin TO-92, Bulk Box", Manufacturer="On Semiconductor", ComponentLink1Description="Manufacturer URL", ComponentLink1URL=http://www.onsemi.com/, ComponentLink2Description=Datasheet, ComponentLink2URL=http://www.onsemi.com/pub_link/Collateral/BC556B-D.PDF, ComponentLink3Description="Package Specification", ComponentLink3URL=http://www.onsemi.cn/pub_link/Collateral/2N6426-D.PDF, DatasheetVersion="Rev. 3", IC Continuous (A)=-0.1, Mounting Technology="Through Hole", PackageDescription="3-Pin Transistor Outline, Body 4.825 x 3.685 mm, Pitch 1.27 mm", PackageReference=TO-92-3-29-11_AM_SL, PackageVersion="Rev. AM", Packing="Bulk Box", PartNumber=BC557C, Polarity=PNP, RoHS=FALSE

## Via types
v1: diameter 50, hole 28, Top Layer to Bottom Layer, 5 vias

## Nets (pads, with @x,y where several pads share a name; then routed paths per layer and width w, separated by ;. In a path a pad name is that pad's centre, name@x,y a point inside that pad or via, vN(x,y) a via of type N, cw(c..) or ccw(c..) an arc to the next point about the centre after c; other vN are vias at no path point)
+5V: "IC2 Opamp.8" C2.2 C3.1 | length 400.7
  Top Layer w25: 4793,3279.37 4801.44,3270.93
  Top Layer w50: C2.2 4793,3279.37 ; 4801.44,3270.93 C3.1 4930.93,3270.93 5045,3385
GND: "IC2 Opamp.4" B1.4 B2.4 C1.1 C2.1 C3.2 C4.1 C5.1 C6.1 C7.1 C8.2 C9.2 C10.1 C11.2 C12.1 C13.1 D2.2 IC1.2 IC3.6 IC3.18 IC3.32 K3.2 K6.1 K7.3 K10.3 K11.6 K12.10 L2.2 R6.2 R8.1 R9.2 R10.1 R15.1 R20.1 T1.3 T4.3 T5.3 | length 20428.4
  Top Layer w25: R10.1 1395,3590 T1.3 ; C4.1 2344.07,3362.97 C11.2 2344.07,2724.93 2400,2669 2476,2669 2578.44,2566.56 2583.32,2566.56 2597.38,2552.5 IC3.18 ; D2.2 3279.8,3400 3378.39,3400 3428.39,3450 ; C1.1 3376,3952.39 3428.39,3900 R6.2 3428.39,3450 ; C9.2 3380,1820 IC3.32 3555,1995 3745,1995 ; K10.3 3735,1734.75 3754.07,1753.82 3754.07,1985.93 3745,1995 ; C5.1 4163,3112.63 4163,3788 T4.3 4374,3905 4379,3910 R20.1 ; T5.3 4769,4221 4769,4093 4705,4029 4705,3609.18 4719.64,3594.54 4739,3594.54 ; C6.1 4739,3594.54 ; C3.2 4797.63,3200 4797,3200.63 C2.1 ; K12.10 5170.36,1900 5185,1914.64 5185,2736.61 5177.68,2743.94 R15.1 5100.16,2811.61 5028.54,2740 4785.5,2740 4730.97,2794.54 C12.1 4574.64,2794.54 4560,2809.18 4560,3125 4635.63,3200.63 C2.1 ; R8.1 5305.39,3615.36 5320.03,3630 5320.03,4379.97 ; R9.2 5405,2975 5345,3035 5345,3085 5464.54,3204.54 C13.1 5559.54,3204.54 K7.3 5560.7,3484.3 C7.1 ; 3428.39,3450 3428.39,3261.61 IC1.2 3674.54,3015.46 C8.2 3674.54,2682.96 IC3.6 3755,2502.5 3755,1994 3754,1995 3745,1995 ; C2.1 4638,3257.63 4638,3493.54 4739,3594.54
  Top Layer w95: L2.2 5320.03,4379.97 ; 5341.57,4358.43 5341.57,4262.71 K3.2
  Top Layer w100: 5320.03,4379.97 5341.57,4358.43
  Bottom Layer w25: T1.3 1505,3610 2321.1,3610 C4.1 2505.1,3426 3146.2,3426 D2.2 ; K6.1 2785,1595 3055,1595 K11.6 3190,1460 3470,1460 K10.3 ; IC1.2 3630.49,3059.51 3928.88,3059.51 C10.1 4072,3070.63 4077,3065.63 C5.1 4560,3065.63 C2.1 4903.13,2992.5 5252.5,2992.5 5345,3085 ; T5.3 4865,4265 L2.2
  Bottom Layer w100: B1.4 2440.06,4565 2540,4465.06 2540,4265 2630,4175 2630,4055 2693.58,3991.42 2906.42,3991.42 2965,4050 2965,4425 2825,4565 B2.4 2885,4655 3085,4655 3376,4364 C1.1
NetB1_2: B1.2 B2.3 K1.2 RE1.21 | length 2306
  Top Layer w100: K1.2 1520,4217.71 1520,4465 1610.87,4555.87 RE1.21 1852.36,4445.87 1852.36,4311.88 1849.58,4309.09 1849.58,4133.58 1908.16,4075 2160,4075 2350,4265 2645,4265 B2.3
NetB1_3: B1.3 K2.1 RE1.22 | length 2444.2
  Top Layer w100: K2.1 1288.58,4705 1220,4636.42 1220,3993.58 1278.58,3935 1530,3935 1685,4090 1685,4300.08 RE1.22
  Bottom Layer w100: RE1.22 1852.56,4357.44 1993.58,4216.42 2076.42,4216.42 2275,4415 B1.3
NetB2_1: B2.1 C4.2 IC1.1 | length 5279.4
  Top Layer w50: C4.2 2593.9,3913.9 B2.1
  Bottom Layer w50: C4.2 2228.9,3840 1117.82,3840 1088.53,3810.71 1088.53,3419.29 1117.82,3390 1809.96,3390 1974.96,3225 3295,3225 3395,3125 IC1.1
NetB2_2: B2.2 K1.1 RE1.11 | length 3117.4
  Bottom Layer w100: K1.1 1313.58,4262.71 1095,4481.29 1095,4831.42 1153.58,4890 1831.42,4890 1890,4831.42 1890,4608.23 1948.58,4549.65 2031.42,4549.65 RE1.11 ; 2066.99,4585.22 2219.77,4738 2626.42,4738 2685,4679.42 2685,4375 B2.2
NetC6_2: C6.2 IC3.9 R5.1 | length 6128.2
  Top Layer w25: IC3.9 3434.5,2482 2798,2482 2755,2525 2755,2575 2615,2715 2595,2715 2545,2765 2545,3140 3242,3837 3242,4600 3462,4820 4592,4820 4820,4592 4820,3843 4775,3798 C6.2 4819,3665.46 4869.11,3615.36 R5.1
NetC7_2: "IC2 Opamp.5" C7.2 R4.1 | length 443
  Top Layer w25: 5345,3385 5385.72,3425.72 R4.1 5448,3615.36 5498.11,3665.46 C7.2
NetC11_1: C11.1 IC3.17 L1.1 | length 1955.9
  Top Layer w25: C11.1 2415,2788.98 2432.12,2771.87 2446.57,2771.87 2446.76,2771.67 2463.33,2771.67 2677.11,2557.89 2699.61,2557.89 IC3.17
  Bottom Layer w25: L1.1 1739.17,2945.83 2240,2445 2597.5,2445 IC3.17
NetC12_2: C12.2 IC3.10 R14.1 | length 1890.6
  Top Layer w25: C12.2@4669.49,2864.96 4669.49,3004.49 v1(4670,3005) ; C12.2 4681.87,2853.59 4736.41,2853.59 4772.19,2817.81 4808.8,2817.81 R14.1
  Bottom Layer w25: IC3.10 3471.5,2486 3725,2486 3755,2516 3755,2645 4070,2960 4625,2960 v1(4670,3005)
NetC13_2: "IC2 Opamp.3" C13.2 R13.1 | length 1152.3
  Top Layer w25: 5245,3085 5435.46,3275.46 C13.2 ; R13.1 5705,3615.36 v1(5705,3452)
  Bottom Layer w25: 5245,3085 5245,3150 5547,3452 v1(5705,3452)
NetC14_1: C14.1 D3.2 IC3.29 | length 1572.5
  Top Layer w25: C14.1 2770,1724.07 2770,1300 2820,1250 3130,1250 3245.12,1365.12 D3.2 3205,1770.12 IC3.29
NetC14_2: C14.2 K11.3 | length 703
  Top Layer w25: C14.2 2835,1319.64 2849.64,1305 3010,1305 3050,1345 K11.3
NetD1_2: D1.2 RE1.A2 T1.1 | length 560.6
  Top Layer w50: D1.2 1740.2,3599.8 1742.36,3601.97 RE1.A2
  Bottom Layer w25: T1.1 1600,3755 1601.65,3756.65 RE1.A2
NetD2_1: D2.1 IC3.11 R3.2 R6.1 | length 3602.6
  Top Layer w25: IC3.11 3305,2602 3200,2707 D2.1 3079.64,3130.2 3065,3144.84 3065,3530.74 3079.64,3545.39 3296,3545.39 ; R6.1 3296,3545.39 ; R3.2 3595.89,4435.36 3581.24,4450 3310.64,4450 3296,4435.36 3296,3545.39
"NetIC2 Opamp_1": "IC2 Opamp.1" R11.1 R14.2 | length 780.4
  Top Layer w25: R14.2 4895,2968.39 4895,3078.12 4909.64,3092.76 5003.85,3092.76 5011.61,3085 5045,3085 5180,2950 5180,2826.26 5194.64,2811.61 R11.1
"NetIC2 Opamp_2": "IC2 Opamp.2" R12.2 R15.2 | length 601.3
  Top Layer w25: v1(4950,3040) 4954.78,3035.22 4954.78,2894.59 4960.98,2888.39 R12.2@4971.5,2888.39 ; R12.2 R12.2@4971.5,2888.39 ; R15.2 5036.11,2888.39 5036,2888.5 4974,2888.5 R12.2@4971.5,2888.39
  Bottom Layer w25: v1(4950,3040) 4954.78,3044.78 4954.78,3093.78 5000,3139 5091,3139 5145,3085
"NetIC2 Opamp_6": "IC2 Opamp.6" R1.2 R8.2 | length 529.3
  Top Layer w25: R1.2 5200,3692.13 ; R8.2 5200,3692.13 ; 5245,3385 5144,3486 5144,3636.13 5200,3692.13
"NetIC2 Opamp_7": "IC2 Opamp.7" R1.1 R5.2 | length 449.8
  Top Layer w25: R5.2 4954,3692.13 5030.77,3615.36 R1.1 5071.44,3458.56 5145,3385
NetIC3_1: IC3.1 R19.2 | length 1643.8
  Top Layer w25: IC3.1 4416,2663.5 4416,3376 4635,3595 4635,3938.39 4569.43,4003.96 4559.59,4003.96 4553.39,4010.16 R19.2
NetIC3_2: IC3.2 K7.2 R16.1 | length 2302.7
  Top Layer w25: R16.1 5706.2,2817.81 5736.59,2817.81 5760,2841.23 5760,3185 K7.2
  Bottom Layer w25: IC3.2 4282.5,2630 5119,2630 5505,3016 5505,3050 K7.2
NetIC3_7: IC3.7 K5.2 | length 381.3
  Bottom Layer w25: K5.2 3472.5,2785 IC3.7
NetIC3_8: IC3.8 K5.1 | length 381.3
  Bottom Layer w25: K5.1 3438,2667 3490.5,2667 IC3.8
NetIC3_12: IC3.12 K9.5 | length 312.1
  Top Layer w25: K9.5 3205,2610 IC3.12
NetIC3_13: IC3.13 K9.4 | length 312.1
  Top Layer w25: K9.4 3105,2610 IC3.13
NetIC3_14: IC3.14 K9.3 | length 312.1
  Top Layer w25: K9.3 3005,2610 IC3.14
NetIC3_15: IC3.15 K9.2 | length 312.1
  Top Layer w25: K9.2 2905,2610 IC3.15
NetIC3_16: IC3.16 K9.1 | length 312.1
  Top Layer w25: K9.1 2805,2610 IC3.16
NetIC3_19: IC3.19 R7.2 | length 1757.8
  Top Layer w25: R7.2 1215,3525 2123,2617 2440.5,2617 IC3.19
NetIC3_20: IC3.20 K4.3 | length 854.8
  Top Layer w25: K4.3 2355,1775 2355,2502.5 IC3.20
NetIC3_21: IC3.21 K4.2 | length 247.3
  Top Layer w25: IC3.21 2495,1855 K4.2
NetIC3_22: IC3.22 K4.1 | length 247.3
  Top Layer w25: IC3.22 2595,1855 K4.1
NetIC3_23: IC3.23 K6.3 | length 538.2
  Top Layer w25: K6.3 2660,1670 2660,1890 IC3.23
NetIC3_24: IC3.24 K6.2 | length 492.6
  Top Layer w25: K6.2 2699.61,1609.61 2699.61,1939.61 IC3.24
NetIC3_27: IC3.27 K11.1 | length 613.3
  Top Layer w25: K11.1 2895.02,1454.98 2895.02,1835.02 IC3.27
NetIC3_28: IC3.28 K11.4 | length 467.8
  Top Layer w25: K11.4 3105,1555 IC3.28
NetIC3_30: IC3.30 K11.5 | length 1622.2
  Bottom Layer w25: K11.5 3215,1335 3535,1335 3865,1665 3865,1780.36 3850.36,1795 3455,1795 IC3.30
NetIC3_33: IC3.33 K10.1 | length 249
  Top Layer w25: K10.1 3535,1875 IC3.33
NetIC3_34: IC3.34 K10.2 | length 249
  Top Layer w25: K10.2 3705,1795 IC3.34
NetIC3_35: IC3.35 K12.4 R22.1 | length 2726.6
  Top Layer w25: R22.1 3430,1550 3493,1613 3743,1613 3805,1675 IC3.35
  Bottom Layer w25: IC3.35 3950,1800 5265.36,1800 5280,1814.64 5280,2035 K12.4
NetIC3_36: IC3.36 K12.2 R21.1 | length 2624.8
  Top Layer w25: R21.1 3351.61,1350 3420.61,1281 3595,1281 3905,1591 IC3.36 4380,2420 5070,2420 5115,2375 K12.2
NetIC3_37: IC3.37 K12.3 | length 1115.6
  Bottom Layer w25: IC3.37 4260,2200 K12.3
NetIC3_38: IC3.38 K12.5 | length 974.2
  Bottom Layer w25: IC3.38 4260,2100 K12.5
NetIC3_39: IC3.39 K12.7 | length 832.8
  Bottom Layer w25: IC3.39 4260,2000 K12.7
NetIC3_40: IC3.40 K12.9 | length 728.6
  Bottom Layer w25: IC3.40 4970,1945 K12.9
NetK2_2: K2.2 RE1.12 RE1.24 | length 1489.3
  Top Layer w100: RE1.24 1849.04,4860.97 2120.45,4860.97 2179.03,4802.39 2179.03,4529.03 2037.64,4387.64 RE1.12
  Bottom Layer w100: K2.2 1614.29,4754.29 RE1.24
NetK3_1: K3.1 R2.2 R4.2 R9.1 R13.2 | length 2457.5
  Top Layer w25: R4.2 5460,3692.13 5512.87,3745 5605,3745 5653.8,3696.2 5695.93,3696.2 R13.2 5750,3692.13 5805,3637.13 5805,2816 5725,2736 5480.61,2736 R9.1 5440,2811.61 5516.77,2888.39 R2.2
  Top Layer w40: R13.2 5700,3877 5885.71,4062.71 K3.1
NetK8_1: K8.1 L2.3 | length 513.6
  Top Layer w95: L2.3 5495,4505 K8.1
NetK8_2: K8.2 L2.4 | length 517.8
  Bottom Layer w95: L2.4 5505,4705 K8.2
NetL2_1: "MOSFET 1.2" L2.1 | length 765.2
  Bottom Layer w95: 4570,4625 4570,4553.58 4628.58,4495 4835,4495 5020.52,4680.52 5119.48,4680.52 L2.1
"NetMOSFET 1_1": "MOSFET 1.1" R18.2 | length 380.3
  Top Layer w50: 4470,4625 4475,4620 R18.2
NetR7_1: R7.1 R10.2 T1.2 | length 305.8
  Top Layer w25: R7.1 R10.2 1374,3666.77 1412.23,3705 T1.2
NetR11_2: R11.2 R12.1 | length 626.1
  Top Layer w25: R12.1 4968.7,2817.81 5021.05,2817.81 5028.24,2825 v1(5035,2825) ; R11.2 5307.39,2888.39 5344,2925 v1(5344,2948)
  Bottom Layer w25: v1(5035,2825) 5035,2933.36 5049.64,2948 v1(5344,2948)
NetR17_1: R17.1 T2.2 T4.1 T5.2 | length 2383
  Top Layer w25: R17.1 3686.61,4381.61 3690,4385 3900,4385 4236,4049 ; T4.1 4236,4049 ; T2.2 4236,4215 4236,4049
  Bottom Layer w25: T2.2 4327.22,4217.22 4327.22,4245.04 4327.5,4245.32 4327.5,4262.5 4395,4330 4590,4330 4673.87,4246.13 4673.87,4216.13 T5.2
NetR18_1: R18.1 T2.3 T5.1 | length 521
  Top Layer w25: T2.3 4336.97,4113.3 4344.12,4106.81 4457.2,4106.81 4476.59,4126.21 4476.59,4137.17 4476.56,4137.77 R18.1 4491.04,4169.36 4491.65,4169.36 4605,4165 T5.1
NetR19_1: R19.1 R20.2 T4.2 | length 318.9
  Top Layer w25: T4.2 4390,4020 R19.1 4476.61,4001.39 4550,3928 R20.2
"VCC +5V": C5.2 C8.1 C9.1 C10.2 D1.1 D3.1 IC1.3 IC3.5 IC3.31 K6.4 K7.1 K11.2 K12.1 L1.2 R2.1 R16.2 R21.2 R22.2 RE1.A1 | length 10354.5
  Top Layer w25: D3.1 2944.88,1505.12 K11.2 3055,1605 3055,2000 3109,2054 3201,2054 3255,2000 3255,1874 3291.24,1837.76 3291.24,1647.83 3291.24,1638.05 3297.88,1630.86 3353.23,1571 ; IC3.31 3325,1865 3325,1686.3 3339.64,1671.65 3362.88,1671.65 C9.1 3380,1597.77 3353.23,1571 ; R21.2 3428.39,1419.84 3422.19,1426.04 3412.34,1426.04 3392.81,1445.57 3392.81,1447.86 3379.63,1461.04 3377.34,1461.04 3359.43,1478.96 3359.43,1508.8 R22.2 3353.23,1571 ; R2.1 5587,2811.61 5663.77,2888.39 R16.2 K7.1
  Top Layer w50: RE1.A1 2089.8,3704.49 D1.1 2161.54,3480 2190.83,3450.71 L1.2 ; IC1.3 3745.46,3042.96 C8.1 3745.46,2712.04 IC3.5
  Bottom Layer w50: L1.2 2210.83,3315 3473.43,3315 IC1.3@3660.94,3127.49 ; K6.4@2390,1497.02 2390,1429.29 2419.29,1400 2750,1400 2817.48,1467.48 2913.43,1467.48 2945.95,1500 K11.2 ; IC3.31 3405.6,1945.6 3405.6,1970.6 3785,2350 4182.5,2350 ; IC1.3 3687.8,3149.37 C10.2 3945,3144.37 C5.2 ; IC3.5 3905.6,2551.9 3918.52,2551.9 4010.42,2460 4072.5,2460 4182.5,2350 ; K7.1 5840.71,3145 5870,3115.71 5870,2790 5740,2660 5383.74,2660 5028.27,2304.53 5019.53,2304.53 K12.1 4965,2350 4182.5,2350
VIN: "MOSFET 1.3" B1.1 C1.2 R3.1 R17.2 T2.1 | length 4420.1
  Top Layer w25: R3.1 3519.11,3409.64 3533.76,3395 3748.74,3395 3763.39,3409.64 R17.2 3770,3906.61 C1.2@3770,4305
  Bottom Layer w50: C1.2@3770,4305 4240,4305 T2.1 4280,4666.26 4343.74,4730 4594.27,4730 4667.13,4657.14 4667.13,4627.87 4670,4625
  Bottom Layer w100: B1.1 2385,4064.49 2604.49,3845 3410,3845 3776,4211 C1.2
pads on no net: IC3.3 IC3.4 IC3.25 IC3.26 K12.6 K12.8 RE1.14

## Silkscreen, mask and mechanical layers (free items; w line width, h text height)
Top Overlay:
  text "Designed by :  / Jonas Vanhulst / PXL-Hasselt / 1 Electronics-ICT /  / Soldering Iron" at 1190,1675 h60 r359.8

## Text inside footprints (layer, text, board x,y; h text height)
K11: Top Overlay "6" at 3218.11,1485.43 h40; Top Overlay "5" at 3218.11,1379.13 h40; Top Overlay "2" at 2854.33,1485.43 h40; Top Overlay "1" at 2866.14,1379.13 h40
"MOSFET 1": Mechanical 13 "TAB" at 4551.25,4693.8 h25